# Altium PCB PCB1.PcbDoc
Units mil, origin at the board's own origin, x right, y up, seen from the top; angles counter-clockwise.
Board outline 6000 x 4000 mil, 2 copper layers (Top Layer, Bottom Layer); 20 components, 34 nets, 122 pads, 9 vias.
Unrouted connection lines stored in the file: 99.
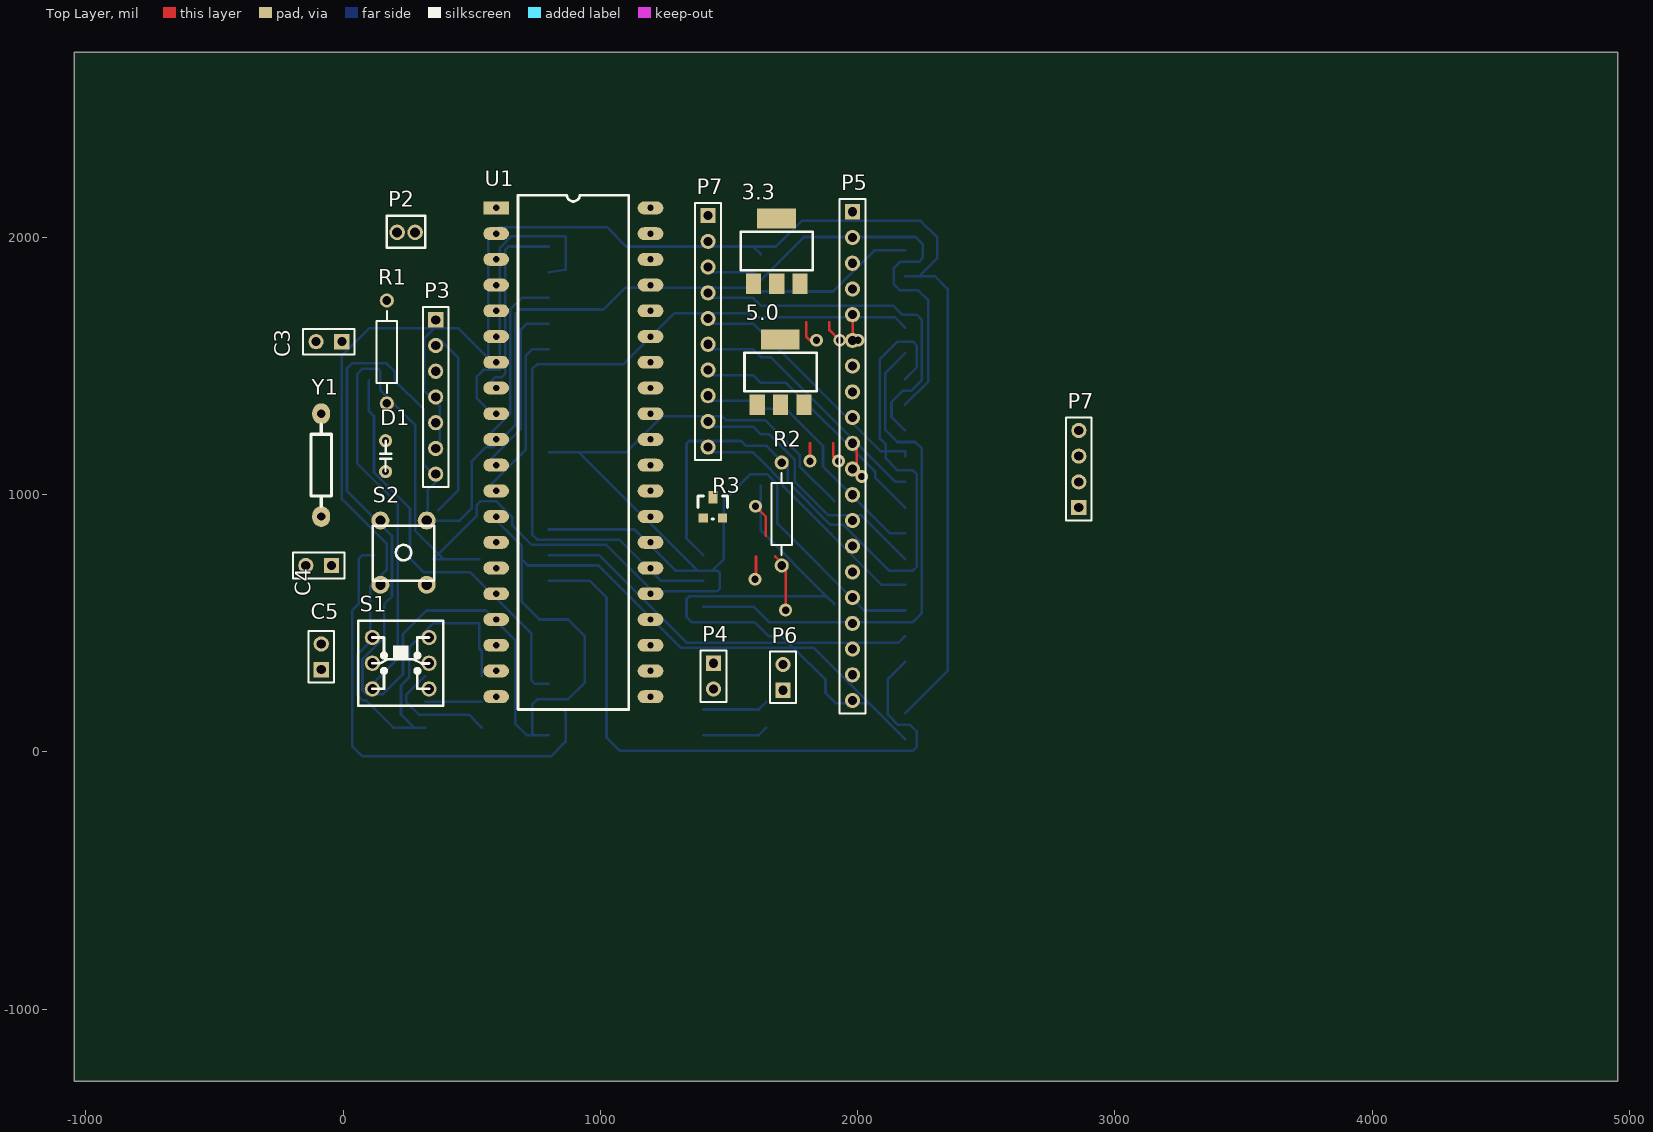
[diagram p0: Top Layer view]
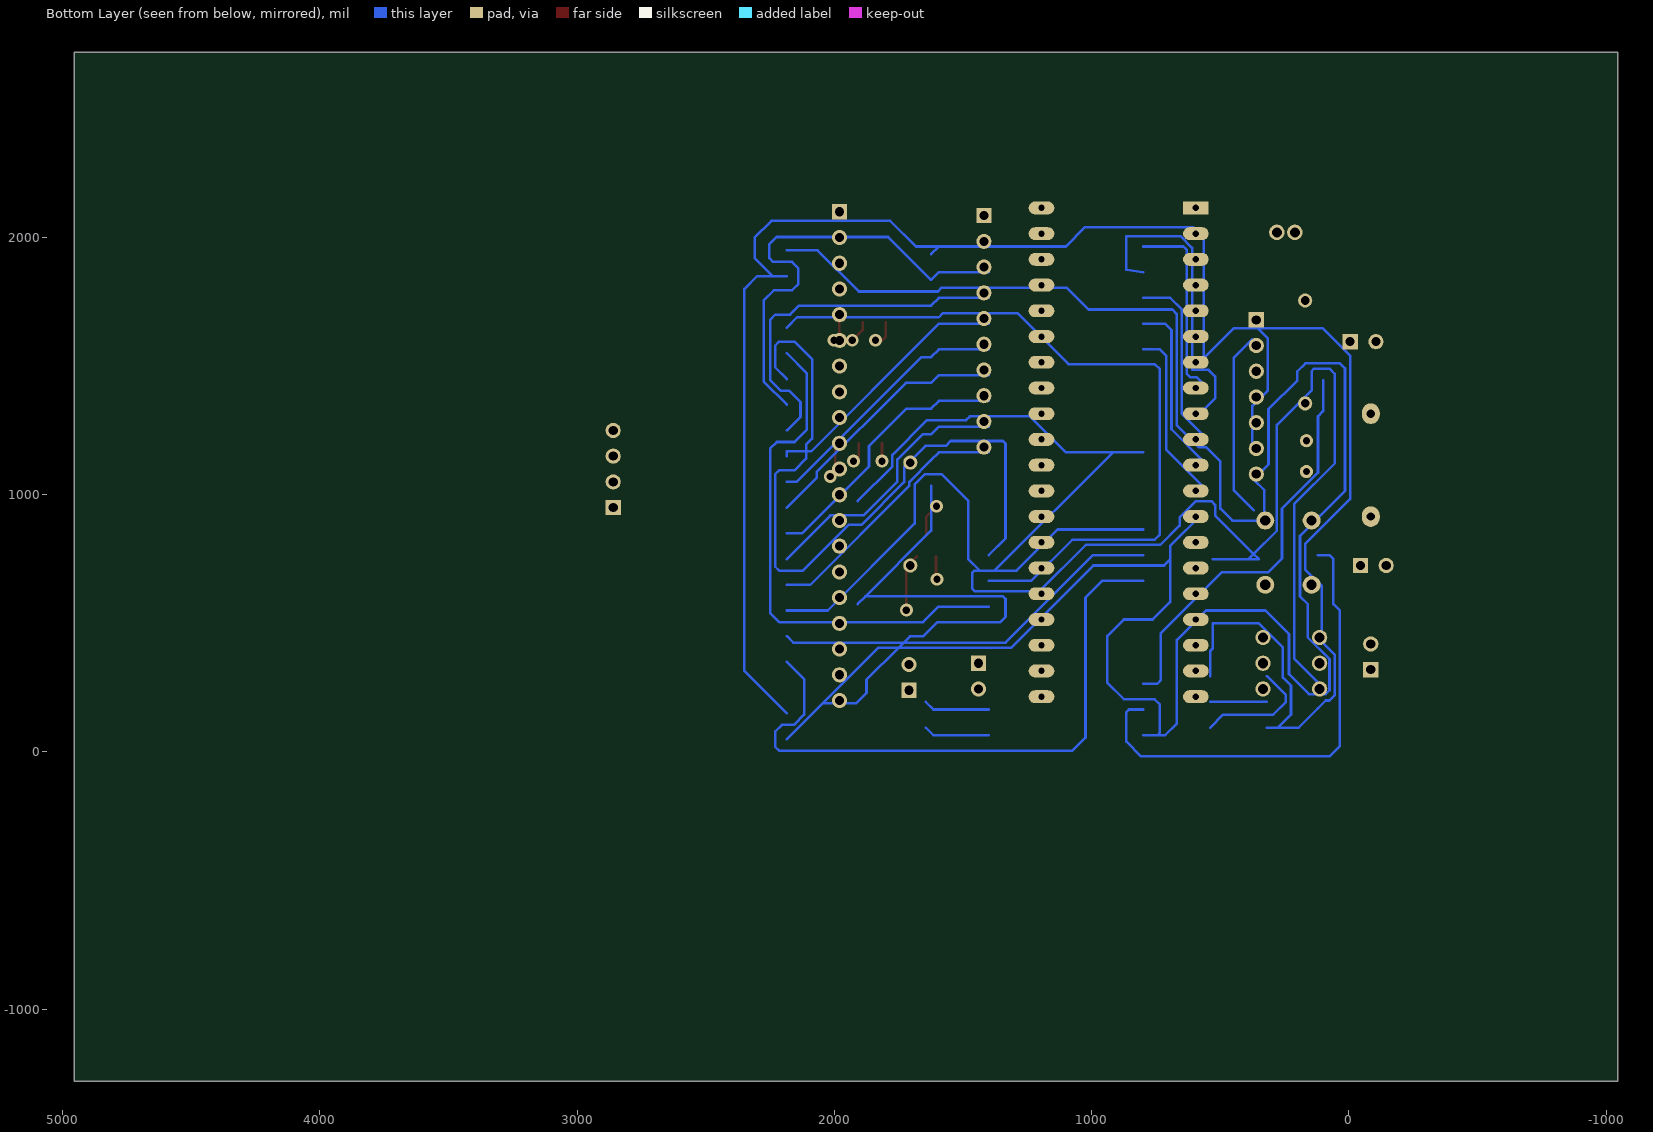
[diagram p1: Bottom Layer view, seen from below]

## Layer stack, top to bottom
Top Solder: solder mask 0.4, Solder Resist, Dk 3.5
Top Layer: signal copper 1.4
Dielectric 1: dielectric 12.6, FR-4, Dk 4.8
Bottom Layer: signal copper 1.4
Bottom Solder: solder mask 0.4, Solder Resist, Dk 3.5

## Board outline
-1045,-1280 4955,-1280 4955,2720 -1045,2720

## Design rules (kind name [scope] priority, off if disabled: settings)
Clearance [All] p1: gap=10
PolygonConnect [All] p1: connectstyle=Relief reliefconductorwidth=10 reliefentries=4 polygonreliefangle="90 Angle" airgapwidth=10
RoomDefinition main [InComponentClass('main')] p1: confinementstyle=ConfineIn formatcopy=TRUE lockcomponents=FALSE outline 4795,-1070 4930,-1070 4930,-550 4795,-550
RoutingVias [All] p1: holewidth=28 width=50 viastyle="Through Hole" minholewidth=28 minwidth=50 maxholewidth=28 maxwidth=50
SolderMaskExpansion [All] p1: expansion=4
Width [All] p1: maxlimit=10 minlimit=10 preferedwidth=10
29 further rules are at their usual default settings.

## Classes and differential pairs
net class LCD_DATA[0..7]: LCD_DATA0 LCD_DATA1 LCD_DATA2 LCD_DATA3 LCD_DATA4 LCD_DATA5 LCD_DATA6 LCD_DATA7

## Components (designator, comment, footprint, x,y, rotation, side; value= is the part's Value field where it differs from the comment)
3.3 "ASM1117-3.3" SOT223 1595,1820 r0 top
5.0 "ASM1117-5.0" SOT223 1610,1350 r0 top
C3 "Cap" HDR1X2 -5,1595 r180 top
C4 "Cap" HDR1X2 -45,725 r180 top
C5 "Cap Pol2" HDR1X2 -85,320 r90 top
D1 "LED1" CB1 165,1090 r90 top
P2 "Header 2" 接线端子2P 30295,27135 r0 top
P3 "KEY" HDR1X7 360,1680 r270 top
P4 "Header 2" HDR1X2 1440,345 r270 top
P5 "LCD12864" HDR1X20 1980,2100 r270 top
P6 "FPGA_POWER" HDR1X2 1710,240 r90 top
P7 "ISP" HDR1X4 2860,950 r90 top
P7 "排阻103" HDR1X10 1418.9,2085 r270 top
R1 "Res2" AXIAL-0.4 170,1555 r90 top
R2 "Res2" AXIAL-0.4 1705,925 r90 top
R3 "Res Tap" SOT-23 1440,990 r0 top
S1 "SW-DPDT" AN88 223.9,345 r0 top
S2 "SW-PB" AN66 235,775 r0 top
U1 "P89C51X2BN" DIP40 595,2115 r0 top
Y1 "XTAL" AXIAL0.4 -85,1115 r270 top

## Footprints (in the part's own frame and the unit in brackets; to place one, negate y for a bottom-side part, rotate by r counter-clockwise, add the part's x,y. Pads: shape width x height; smd on the part's side, far side on the other; paste and mask are expansions set on the pad)
AN66 [mil]
  round 70 hole 40: 1(-90,125) 1(90,125) 2(-90,-125) 2(90,-125)
  silkscreen extent -120,-110 120,105
AN88 [mil]
  round 60 hole 40: 1(-110,100) 2(-110,0) 3(-110,-100) 4(110,-100) 5(110,0) 6(110,100)
  silkscreen extent -165,-165 165,165
AXIAL0.4 [mil]
  oval 80x70 hole 32: 1(-200,0) 2(200,0)
  silkscreen extent -160,-40 160,40
AXIAL-0.4 [mm] "Axial Device, Thru-Hole; 2 Leads; 0.4 in Pin Spacing"
  round 1.4 hole 0.85: 1(-5.08,0) 2(5.08,0)
  silkscreen extent -4.06,-1.02 4.06,1.02
CB1 [mm]
  round 1.3 hole 0.7: 1(0,0) 2(3.048,0)
  silkscreen extent 0,-0.55 3.05,0.52
DIP40 [mil]
  rect 100x50 hole 25: 1(0,0)
  oval 100x50 hole 25: 2(0,-100) 3(0,-200) 4(0,-300) 5(0,-400) 6(0,-500) 7(0,-600) 8(0,-700) 9(0,-800) 10(0,-900) 11(0,-1000) 12(0,-1100) 13(0,-1200) 14(0,-1300) 15(0,-1400) 16(0,-1500) 17(0,-1600) 18(0,-1700) 19(0,-1800) 20(0,-1900) 21(600,-1900) 22(600,-1800) 23(600,-1700) 24(600,-1600) 25(600,-1500) 26(600,-1400) 27(600,-1300) 28(600,-1200) 29(600,-1100) 30(600,-1000) 31(600,-900) 32(600,-800) 33(600,-700) 34(600,-600) 35(600,-500) 36(600,-400) 37(600,-300) 38(600,-200) 39(600,-100) 40(600,0)
  silkscreen extent 85,-1950 515,50
HDR1X2 [mm] "Connector; Header; 2 Position"
  rect 1.5x1.5 hole 0.9: 1(0,0)
  round 1.5 hole 0.9: 2(2.54,0)
  silkscreen extent -1.27,-1.27 3.81,1.27
HDR1X4 [mm] "Connector; Header; 4 Position"
  rect 1.5x1.5 hole 0.9: 1(0,0)
  round 1.5 hole 0.9: 2(2.54,0) 3(5.08,0) 4(7.62,0)
  silkscreen extent -1.27,-1.27 8.89,1.27
HDR1X7 [mm] "Connector; Header; 7 Position"
  rect 1.5x1.5 hole 0.9: 1(0,0)
  round 1.5 hole 0.9: 2(2.54,0) 3(5.08,0) 4(7.62,0) 5(10.16,0) 6(12.7,0) 7(15.24,0)
  silkscreen extent -1.27,-1.27 16.51,1.27
HDR1X10 [mm] "Connector; Header; 10 Position"
  rect 1.5x1.5 hole 0.9: 1(0,0)
  round 1.5 hole 0.9: 2(2.54,0) 3(5.08,0) 4(7.62,0) 5(10.16,0) 6(12.7,0) 7(15.24,0) 8(17.78,0) 9(20.32,0) 10(22.86,0)
  silkscreen extent -1.27,-1.27 24.13,1.27
HDR1X20 [mm] "Connector; Header; 20 Position"
  rect 1.5x1.5 hole 0.9: 1(0,0)
  round 1.5 hole 0.9: 2(2.54,0) 3(5.08,0) 4(7.62,0) 5(10.16,0) 6(12.7,0) 7(15.24,0) 8(17.78,0) 9(20.32,0) 10(22.86,0) 11(25.4,0) 12(27.94,0) 13(30.48,0) 14(33.02,0) 15(35.56,0) 16(38.1,0) 17(40.64,0) 18(43.18,0) 19(45.72,0) 20(48.26,0)
  silkscreen extent -1.27,-1.27 49.53,1.27
SOT223 [mil]
  rect 59x79 smd: 1(0,0) 2(90.55,0) 3(181.1,0)
  rect 150x79 smd: 4(89.88,253.54)
  silkscreen extent -49,52 231,202
SOT-23 [mil]
  rect 36x50 smd: 1(-2,0)
  rect 36x36 smd: 2(-40,-80) 3(35,-80)
  silkscreen extent -60,-85 55,5
接线端子2P [mil]
  round 60 hole 39.37: 1(-30015,-25115) ""(-30085,-25115)
  silkscreen extent -30125,-25175 -29975,-25050

## Part data
3.3 5.0: library part ASM1117
C3 C4: "Capacitor"
C5: "Polarized Capacitor (Axial)"
D1: "Typical RED GaAs LED"
P2 P4: "Header, 2-Pin"
P3: library part "Header 7", "Header, 7-Pin"
P5: library part "Header 20", "Header, 20-Pin"
P6: library part "Header 2", "Header, 2-Pin"
P7: library part "Header 4", "Header, 4-Pin"
P7: library part "Header 10", "Header, 10-Pin"
R1 R2: "Resistor"
R3: "Tapped Resistor"
S1: "Double-Pole, Double-Throw Switch"
S2: "Switch"
U1: "80C51 8-Bit Flash Microcontroller Family, 4 kB Flash"
Y1: "Crystal Oscillator"

## Via types
v1: diameter 50, hole 28, Top Layer to Bottom Layer, 9 vias

## Nets (pads, with @x,y where several pads share a name; then routed paths per layer and width w, separated by ;. In a path a pad name is that pad's centre, name@x,y a point inside that pad or via, vN(x,y) a via of type N, cw(c..) or ccw(c..) an arc to the next point about the centre after c; other vN are vias at no path point)
3.3V: 3.3.2 P6.1 | length 86.1
  Top Layer w10: 1890.55,1670 1890.55,1640.5 v1(1930.55,1600.5)
CLR: P3.6 U1.5 | length 670.7
  Bottom Layer w10: 565,1030 709.53,1174.53 709.53,1540 734.53,1565 800,1565
CLROUT: P4.1 U1.22 | length 257.4
  Bottom Layer w10: 1400,165 1615,165 1645,195
GND: 3.3.1 5.0.1 C3.1 C4.1 D1.2 P3.7 P5.1 P5.20 P6.2 P7.4@2860,1250 P7.10 R2.1 R3.1 U1.20 | length 11647.2
  Top Layer w10: v1(1603,955) 1643,915 1643,840 ; 1800,1670 1800,1615.5 1815,1600.5 v1(1840,1600.5) ; v1(1815,1130.5) 1815,1200
  Bottom Layer w10: 565,930 695,800 695,748 ; 800,65 745,65 ; 1623.9,1035 1623.9,861.1 1880,605 ; 1910,575 1880,605 ; 2185,50 2045,190 ; 2185,1950 2065,1950 1905,1790 1598,1790 1583,1805 1097,1805 1012,1720 686.53,1720 669.53,1703 669.53,1270.53 584,1185 555,1185 500,1130 500,946 453,899 350,899 329,920 329,1019 370,1060 312.44,1117.56 312.44,1332.56 200,1445 200,1480 169,1511 35,1511 15,1491 15,1015 190,840 190,605 160,575 160,445.53 75.47,361 75.47,240 90.47,225 155,225 232.89,302.89 232.89,457.89 325,550 555,550 669,436 669,111 715,65 745,65 ; 695,748 718,725 993.14,725 1313.14,405 1751.11,405 ; 695,748 695,583 763,515 875,515 939,451 939,269 875,205 755,205 735,185 735,75 745,65 ; 1751.11,405 1830,405 2045,190 ; 1751.11,405 1706.32,449.79 1655.21,449.79 1600,505 1355,505 1335,525 1335,595 1345,605 1880,605 ; 1751.11,405 1875.25,280.85 1875.25,229.75 1915,190 2045,190
LCD_EN: P5.6 U1.28 | length 2836.6
  Bottom Layer w10: 1400,765 1335,830 1335,1199 1345,1209 1548,1209 1567,1190 1646,1190 1729,1107 1729,1048.71 1894.71,883 1945,883 2123,705 2215,705 2230,720 2230,1080 2215,1095 2155,1095 2110,1140 2110,1195 2087,1218 2087,1527 2155,1595 2215,1595 2230,1580 2230,1495 2185,1450
LCD_RD: P5.4 U1.27 | length 2945.2
  Bottom Layer w10: 1400,665 1235,665 1075,825 755,825 735,845 735,1488 755,1508 1090,1508 1287,1705 1579,1705 1594,1690 2145,1690 2185,1650
LCD_WR: P5.5 U1.26 | length 2030.5
  Bottom Layer w10: 1400,565 1595,565 1655,505 2215,505 2250,540 2250,1179 2224,1205 2155,1205 2108,1252 2108,1473 2185,1550
MOD1: P3.2 U1.1 | length 738.7
  Bottom Layer w10: 565,1430 591.28,1456.28 615.8,1456.28 629.53,1470 629.53,1951.53 643,1965 800,1965
MOD2: P3.3 U1.2 | length 1193.1
  Bottom Layer w10: 565,1330 520,1375 520,1460 545.47,1485.47 609.53,1485.47 609.53,1960 654.53,2005 865,2005 865,1875 800,1865
MOD3: P3.4 U1.3 | length 694.1
  Bottom Layer w10: 565,1230 649.53,1314.53 649.53,1720 694.53,1765 800,1765
Net5.0_2: 5.0.2 S1.1 S1.4 | length 544.3
  Top Layer w10: 1905.55,1200 1905.55,1150.5 v1(1925.55,1130.5)
  Bottom Layer w10: 318.9,295 245,221.1 245,194 294,145 488.9,145 538.9,95
Net5.0_3: 5.0.3 P2.1 | length 137.8
  Top Layer w10: 1996.1,1200 1996.1,1090.5 v1(2016.1,1070.5)
NetD1_1: D1.1 R1.2 | length 727.5
  Bottom Layer w10: 370,940 448,1018 448,1532 375,1605
NetP5_3: P5.3 R3.3 | length 225.5
  Top Layer w10: 1680,760 1720.5,719.5 v1(1720.5,551.29)
NetS1_2: S1.2 S1.5 | length 220
  Bottom Layer w10: 318.9,195 538.9,195
P0.0: P5.7 P7.2@1418.9,1985 U1.39 | length 1794
  Bottom Layer w10: 1400,1865 1593.9,1865 1623.9,1835 1790.9,2002 2225,2002 2253,1974 2253,1920 2238,1905 2165,1905 2140,1880 2140,1820 2165,1795 2235,1795 2275,1755 2275,1440 2185,1350
P0.1: P5.8 P7.3@1418.9,1885 U1.38 | length 1404.8
  Bottom Layer w10: 1400,1765 1593.9,1765 1623.9,1735 2137.03,1735 2172.03,1700 2230,1700 2250,1680 2250,1446 2209,1405 2177,1405 2132,1360 2132,1303 2185,1250
P0.2: P5.9 P7.4@1418.9,1785 U1.37 | length 1009.4
  Bottom Layer w10: 1400,1665 1593.9,1665 1623.9,1635 2089.9,1169 2185,1169 2185,1150
P0.3: P5.10 P7.5 U1.36 | length 998.3
  Bottom Layer w10: 1400,1565 1593.9,1565 1623.9,1535 1662,1535 2147,1050 2185,1050
P0.4: P5.11 P7.6 U1.35 | length 1011.2
  Bottom Layer w10: 1400,1465 1593.9,1465 1623.9,1435 1722,1435 2069.2,1087.8 2069.2,1065.8 2185,950
P0.5: P5.12 P7.7 U1.34 | length 1044.6
  Bottom Layer w10: 1400,1365 1593.9,1365 1623.9,1335 1720,1335 1865.55,1189.45 1865.55,1110.5 2126.05,850 2185,850
P0.6: P5.13 P7.8 U1.33 | length 1048.7
  Bottom Layer w10: 1400,1265 1593.9,1265 1623.9,1235 1656.93,1235 1755,1136.93 1755,1051 1886.4,919.6 2015.4,919.6 2185,750
P0.7: P5.14 P7.9 U1.32 | length 1007
  Bottom Layer w10: 1400,1165 1593.9,1165 1623.9,1135 1708.75,1050.15 1708.75,1035.28 2094.03,650 2185,650
P3.2: P5.15 U1.12 | length 2048.2
  Bottom Layer w10: 800,865 1132,865 1292,705 1435,705 1479,749 1479,976 1583,1080 1648,1080 1688,1040 1688,888 2026,550 2185,550
P3.3: P5.16 U1.13 | length 1536.2
  Bottom Layer w10: 800,765 995,765 1335,425 2160,425 2185,450
P3.4: P5.17 U1.14 | length 2459.8
  Bottom Layer w10: 800,665 959,665 1024,600 1024,56 1075,5 2215,5 2230,20 2230,80 2204.53,105.47 2157.81,105.47 2118,145.29 2118,283 2185,350
RST: C5.2 R2.2 S2.1 U1.9 | length 5950.8
  Bottom Layer w10: 120,270 212.89,362.89 212.89,964.11 55,1122 55,1470 75,1490 135,1490 145,1480 145,1406 280,1271 280,860 370,770 ; 530,750 390,750 ; 800,1165 917,1165 ; 1910,975 1775,1110 1775,1155 1640,1290 1488,1290 1473,1305 1240,1305 1100,1165 917,1165 ; 370,770 390,750 ; 370,770 350,750 390,750 ; 370,770 520,920 520,960 535,975 595,975 658,912 658,880.34 733.34,805 1023,805 1203,625 1455,625 1465,635 1465,695 1455,705 1377,705 917,1165
RXD: P7.2@2860,1050 U1.10
START: P3.5 U1.4 | length 682.4
  Bottom Layer w10: 565,1130 689.53,1254.53 689.53,1640 714.53,1665 800,1665
STARTOUT: P4.2 U1.21 | length 257.4
  Bottom Layer w10: 1400,65 1615,65 1645,95
TXD: P7.3@2860,1150 U1.11
VCC: 3.3.3 C5.1 P3.1 P5.2 P5.19 P7.1 R1.1 R3.2 S1.3 S1.6 S2.2 U1.40 | length 8394.5
  Top Layer w10: v1(1601,671.29) 1605,675.29 1605,760 ; 1981.1,1670 1981.1,1620.5 v1(2001.1,1600.5)
  Bottom Layer w10: 318.9,95 275,95 ; 375,1205 375,1345 315,1405 315,1608 355,1648 ; 538.9,295 538.9,393 530,401.9 530,500 350,500 256.5,406.5 256.5,289.5 225,258 225,145 275,95 ; 1623.9,1935 1593.9,1965 ; 2185,150 2350,315 2350,1800 2300,1850 2240,1850 ; 2185,1850 2240,1850 ; 275,95 195,95 120,170 90,200 75.47,200 55.47,220 55.47,378.72 105,428.25 105,645 170,710 170,808 -5,983 -5,1541 102,1648 355,1648 ; 355,1648 447,1648 565,1530 565,2000 605,2040 1025,2040 1100,1965 1400,1965 1593.9,1965 ; 1593.9,1965 1683,1965 1783,2065 2245,2065 2310,2000 2310,1920 2240,1850
XTAL1: C4.2 U1.19 Y1.2 | length 1857.9
  Bottom Layer w10: 120,765 75,765 60,750 60,575 35,550 35,23 75,-17 808,-17 865,40 865,155 855,165 800,165
XTAL2: C3.2 U1.18 Y1.1 | length 1607.6
  Bottom Layer w10: 100,1445 100,1325 120,1305 120,1165 120,1086 260,946 260,753 315,698 495,698 732,461 732,278 745,265 800,265
pads on no net: 3.3.4 5.0.4 P2. P5.18 U1.6 U1.7 U1.8 U1.15 U1.16 U1.17 U1.23 U1.24 U1.25 U1.29 U1.30 U1.31